# Altium PCB FINAL.PcbDoc
Units mil, origin at the board's own origin, x right, y up, seen from the top; angles counter-clockwise.
Board outline 4000 x 3500 mil, 2 copper layers (Top Layer, Bottom Layer); 13 components, 17 nets, 85 pads, 0 vias.
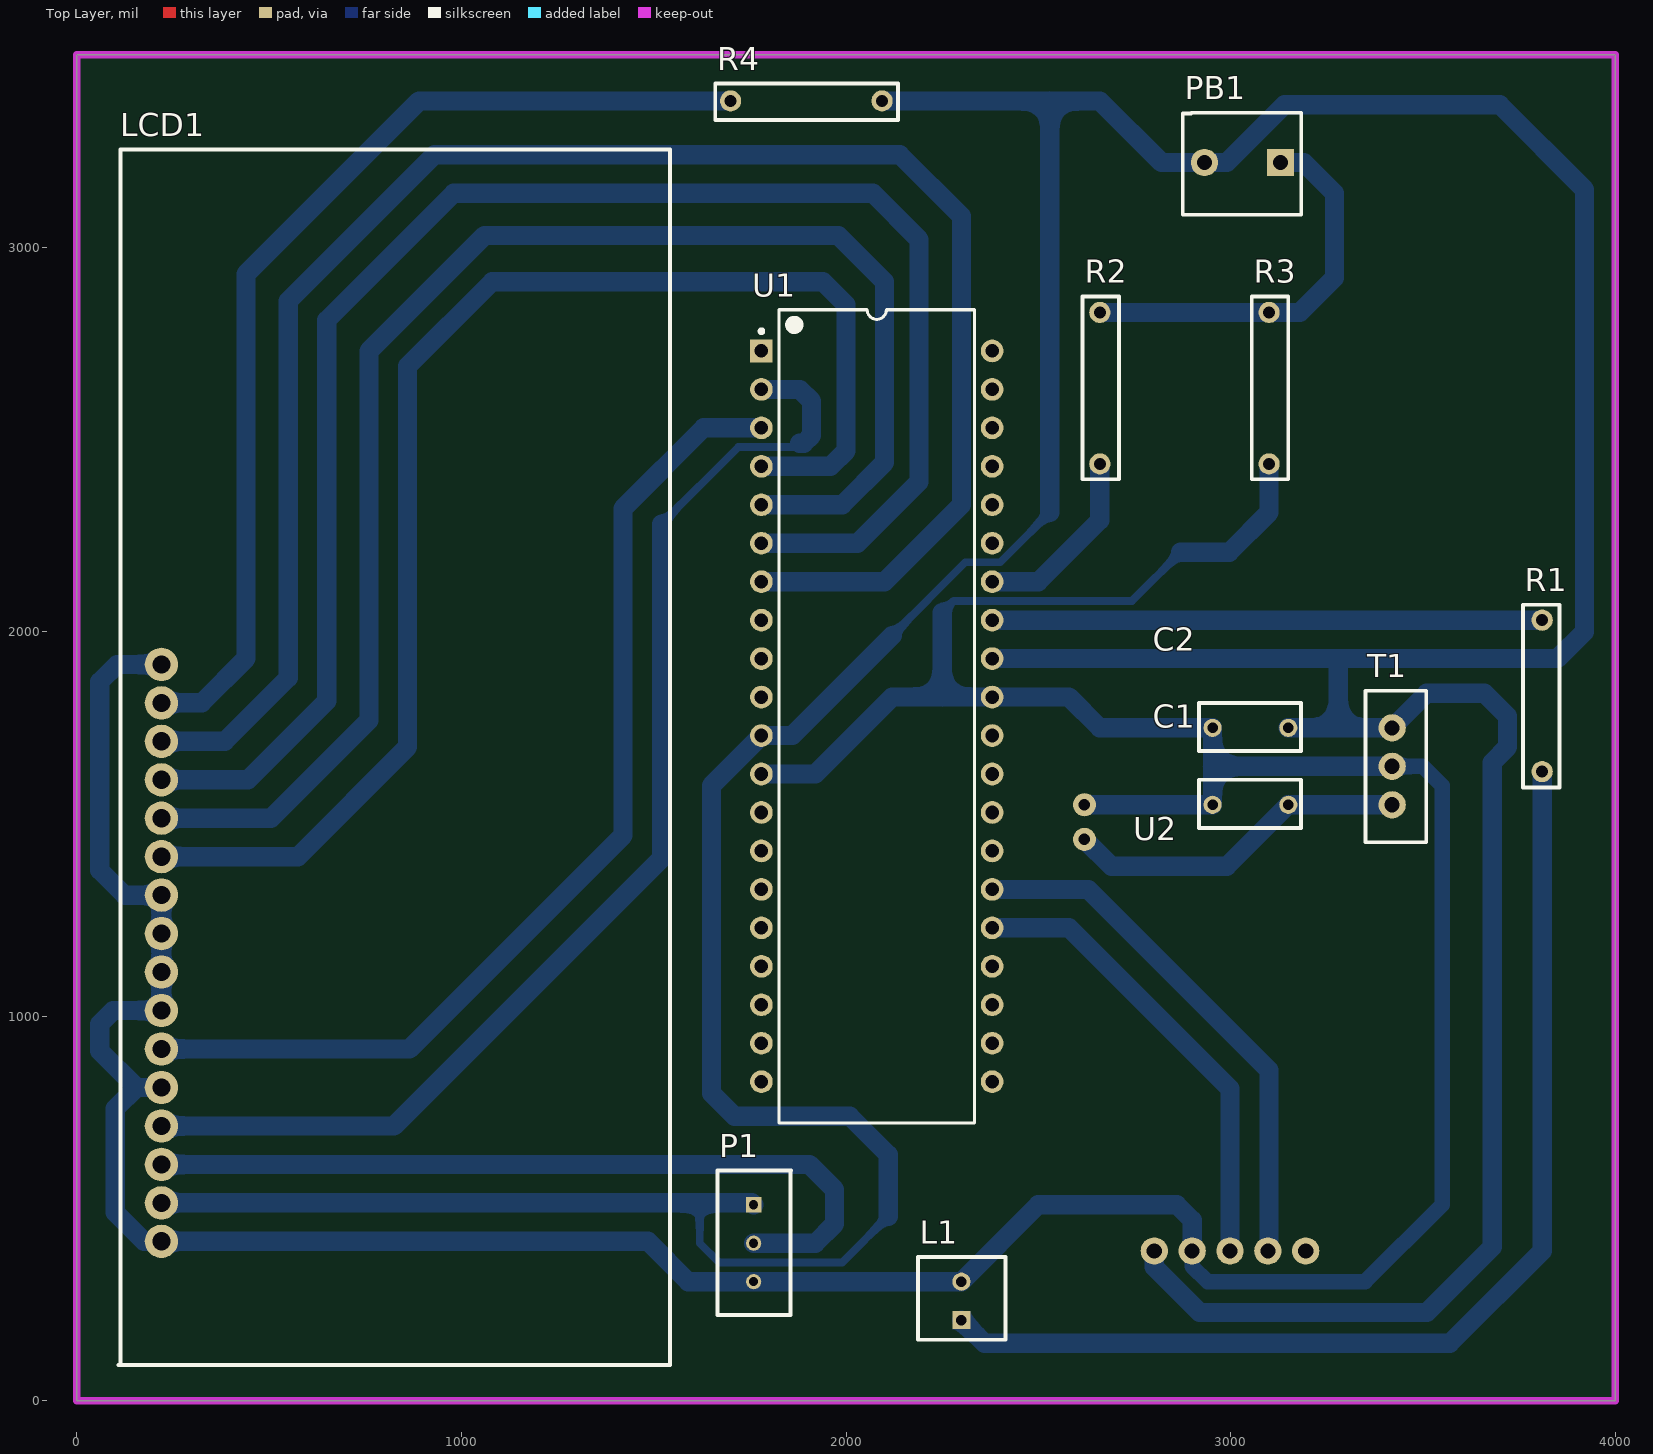
[diagram p0: Top Layer view]
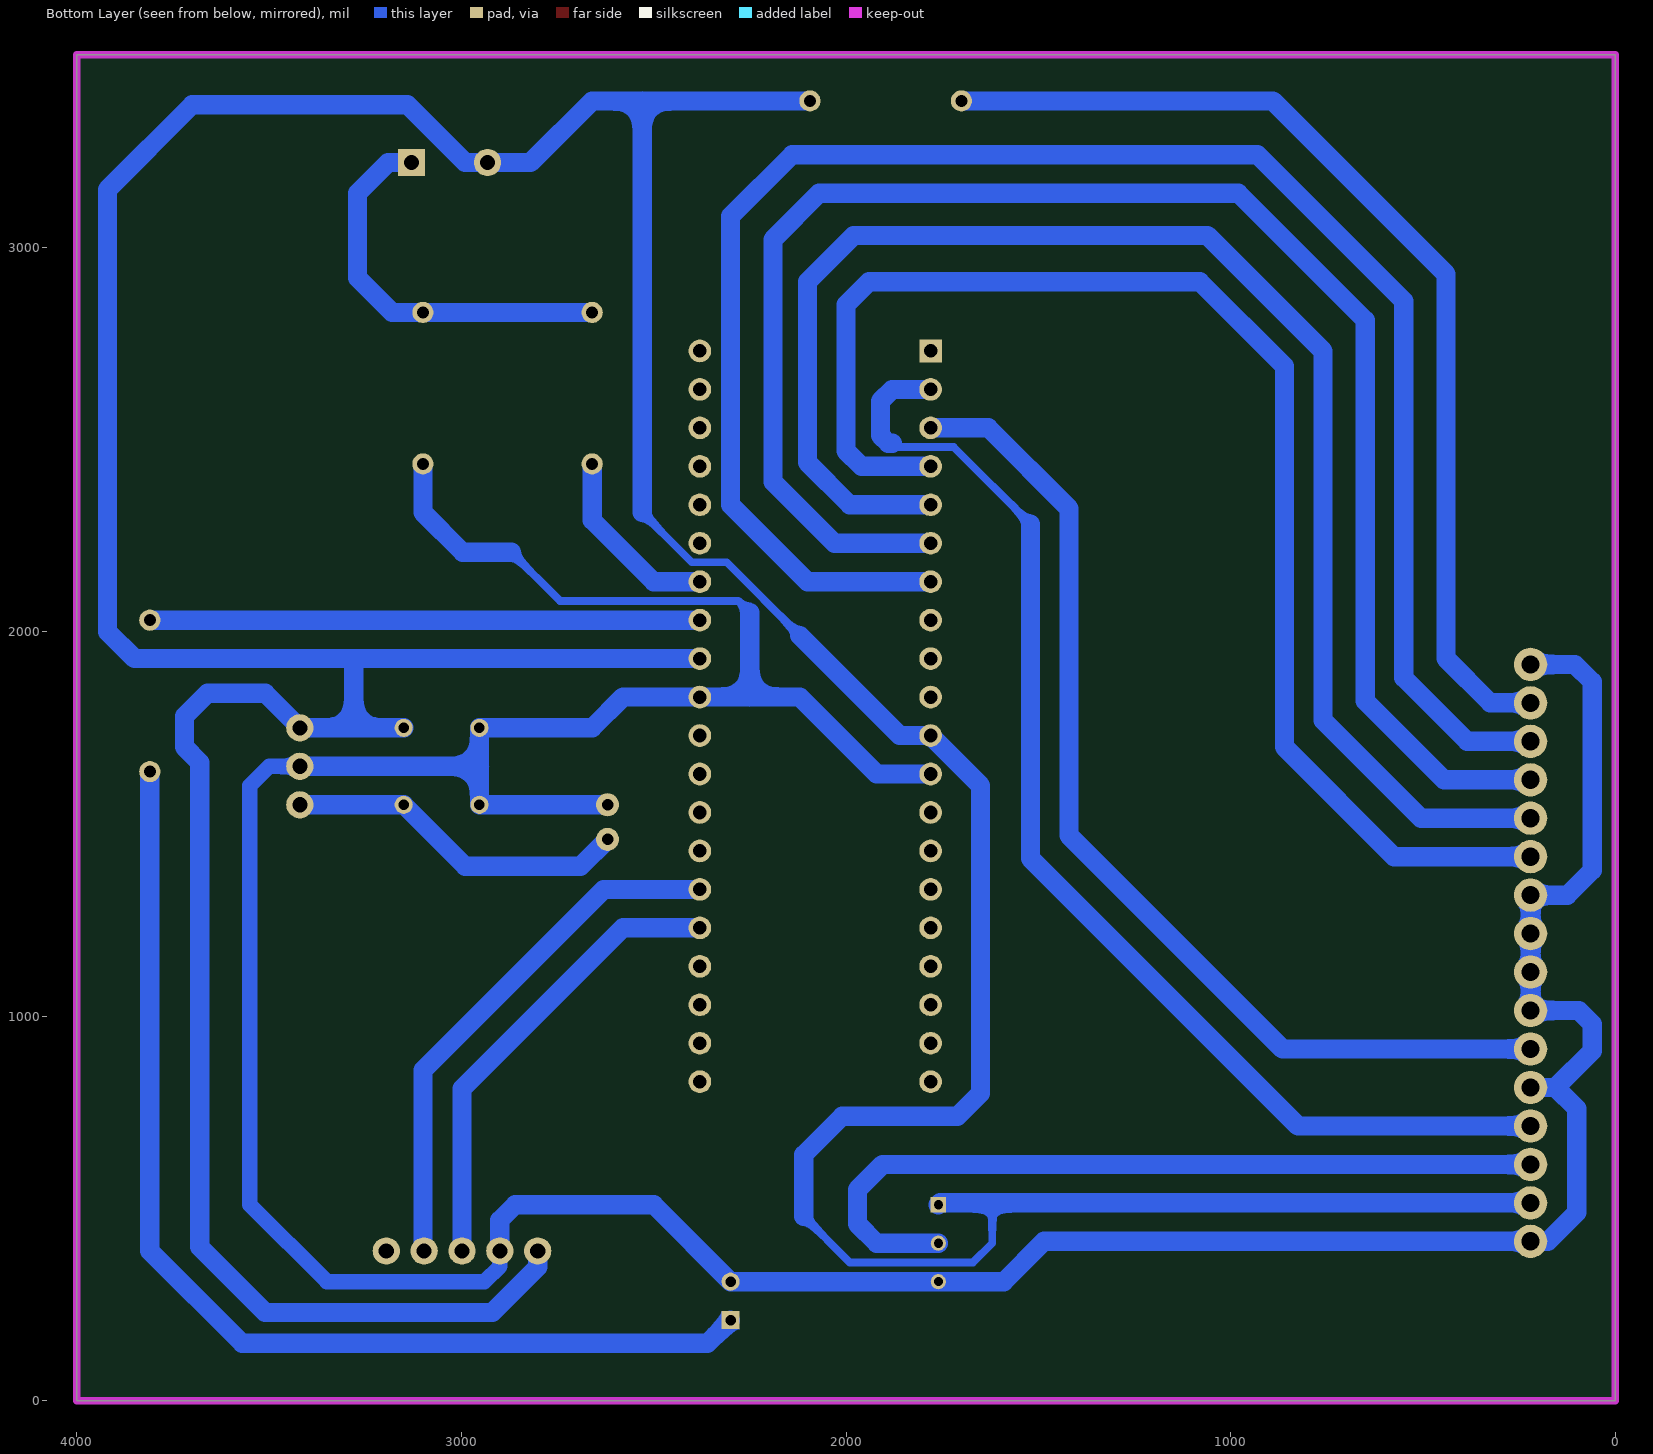
[diagram p1: Bottom Layer view, seen from below]
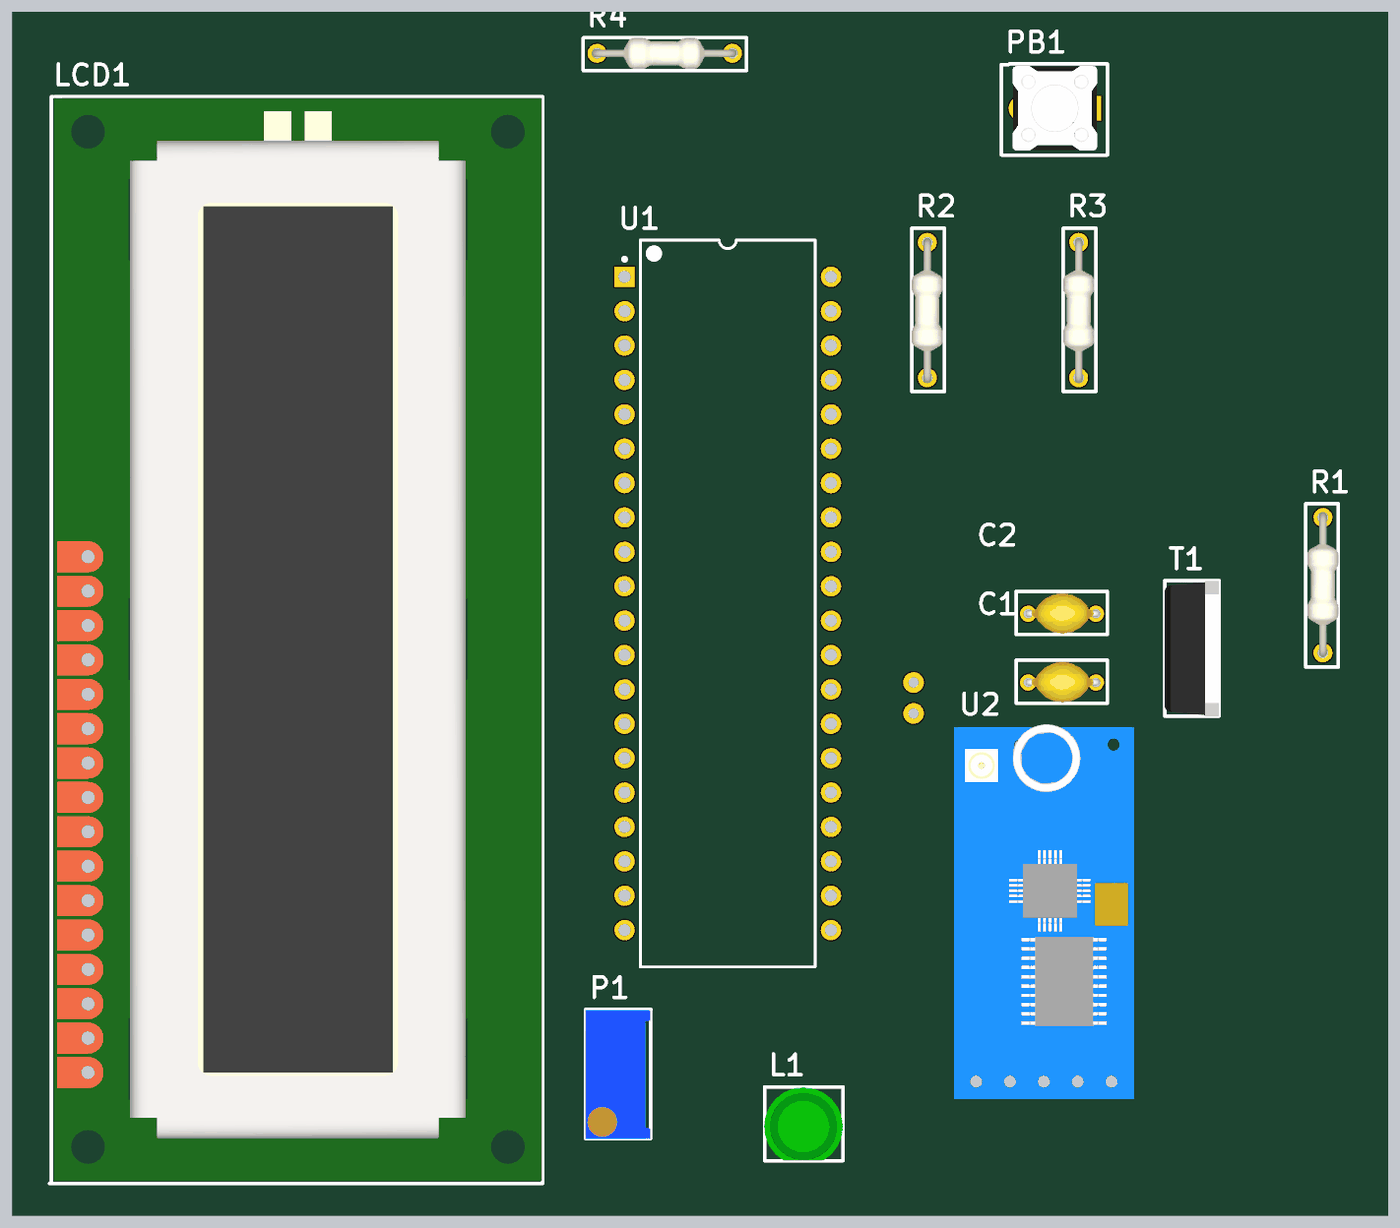
[diagram p2: 3D render of the assembled board from above, using the file's embedded part models]

## Layer stack, top to bottom
Top Solder: solder mask 0.4, Solder Resist, Dk 3.5
Top Layer: signal copper 1.4
Dielectric 1: dielectric 12.6, FR-4, Dk 4.8
Bottom Layer: signal copper 1.4
Bottom Solder: solder mask 0.4, Solder Resist, Dk 3.5

## Board outline
0,0 0,3500 4000,3500 4000,0

## Design rules (kind name [scope] priority, off if disabled: settings)
Clearance [All] p1: gap=10 ignorepadtopadclearanceinfootprint=FALSE
Height [All] p1: minheight=0 maxheight=1500 prefheight=500
PolygonConnect [All] p1: connectstyle=Relief reliefconductorwidth=10 reliefentries=4 polygonreliefangle="90 Angle" airgapwidth=10
RoutingLayers [All] p1: top layer_v5=FALSE bottom layer_v5=TRUE
RoutingVias [All] p1: holewidth=28 width=50 viastyle="Through Hole" minholewidth=28 minwidth=50 maxholewidth=28 maxwidth=50
SolderMaskExpansion [All] p1: expansion=4
Width [All] p1: maxlimit=60 minlimit=20 preferedwidth=55
28 further rules are at their usual default settings.

## Components (designator, comment, footprint, x,y, rotation, side; value= is the part's Value field where it differs from the comment)
C1 "Cap" RAD-0.3 2953.15,1550 r0 top value=100pF
C2 "Cap" RAD-0.3 2953.15,1750 r0 top value=100pF
L1 "LED" LED 2300,210 r180 top
LCD1 "LCD 16*2" LCD 220,415 r90 top
P1 "Potentiometer" Potentiometer 1760,510 r270 top
PB1 "Push Button 2-Pin" "Push Button" 3130,3220 r270 top
R1 "Res1" AXIAL-0.3 3810,2030 r270 top value=1K
R2 "Res1" AXIAL-0.3 2660,2436.3 r90 top value=1K
R3 "Res1" AXIAL-0.3 3100,2436.3 r90 top value=1K
R4 "Res1" AXIAL-0.3 1700,3380 r0 top value=1K
T1 "LM7805" LM7805 3420,1550 r270 top
U1 "PIC16F887-I/P" PDIP600-P40 2080,1780 r0 top
U2 "RF module" HC-12 3195.28,390 r180 top

## Footprints (in the part's own frame and the unit in brackets; to place one, negate y for a bottom-side part, rotate by r counter-clockwise, add the part's x,y. Pads: shape width x height; smd on the part's side, far side on the other; paste and mask are expansions set on the pad)
AXIAL-0.3 [mm] "Axial Device, Thru-Hole; 2 Leads; 0.3 in Pin Spacing"
  round 1.4 hole 0.8: 1(0,0) 2(10,0)
  silkscreen extent -1.02,-1.27 11.05,1.14, body extent -0.4,-1.15 10.31,1.15, height 2.15
HC-12 [mm] "RF module"
  round 1.8 hole 1: 1(0,0) 2(2.5,0) 3(5,0) 4(7.5,0) 5(10,0)
  body extent -1.66,-26.38 11.64,1.32, height 25.91
LCD [mm] "LCD 16x2"
  round 2.2 hole 1.2: A(35.56,0) D0(15.24,0) D1(17.78,0) D2(20.32,0) D3(22.86,0) D4(25.4,0) D5(27.94,0) D6(30.48,0) D7(33.02,0) E(12.7,0) K(38.1,0) RS(7.62,0) RW(10.16,0) V0(5.08,0) VDD(2.54,0) VSS(0,0)
  silkscreen extent -8.17,-33.59 72.1,2.83, body extent -7.98,-33.51 72.02,2.49, height 11.6
LED [mm] "LED"
  rect 1.2x1.2 hole 0.7: 1(0,0)
  round 1.2 hole 0.7: 2(0,-2.54)
  silkscreen extent -2.92,-4.16 2.87,1.29, body extent -2.9,-4.13 2.9,1.27, height 9.2
LM7805 [mm] "Voltage Regulator"
  round 1.8 hole 1: Ground(-2.54,0) Input(0,0) Output(-5.08,0)
  silkscreen extent -7.53,-1.77 2.48,2.25, body extent -7.5,-1.79 2.5,2.22, height 20
PDIP600-P40 [mm] "DIP, 40-Leads, Row Spacing 15.24mm, Pitch 2.54mm, Body 51.8x13.5mm"
  rect 1.5x1.5 hole 0.9: 1(-7.62,24.13)
  round 1.5 hole 0.9: 2(-7.62,21.59) 3(-7.62,19.05) 4(-7.62,16.51) 5(-7.62,13.97) 6(-7.62,11.43) 7(-7.62,8.89) 8(-7.62,6.35) 9(-7.62,3.81) 10(-7.62,1.27) 11(-7.62,-1.27) 12(-7.62,-3.81) 13(-7.62,-6.35) 14(-7.62,-8.89) 15(-7.62,-11.43) 16(-7.62,-13.97) 17(-7.62,-16.51) 18(-7.62,-19.05) 19(-7.62,-21.59) 20(-7.62,-24.13) 21(7.62,-24.13) 22(7.62,-21.59) 23(7.62,-19.05) 24(7.62,-16.51) 25(7.62,-13.97) 26(7.62,-11.43) 27(7.62,-8.89) 28(7.62,-6.35) 29(7.62,-3.81) 30(7.62,-1.27) 31(7.62,1.27) 32(7.62,3.81) 33(7.62,6.35) 34(7.62,8.89) 35(7.62,11.43) 36(7.62,13.97) 37(7.62,16.51) 38(7.62,19.05) 39(7.62,21.59) 40(7.62,24.13)
  silkscreen extent -7.74,-26.85 6.45,26.85, body extent -7.3,-26.85 7.3,26.85, height 6.35
Potentiometer [mm] "10k Ohm"
  rect 1x1 hole 0.6: 1(0,0)
  round 1 hole 0.6: 2(2.54,0) 3(5.08,0)
  silkscreen extent -2.26,-2.38 7.27,2.47, body extent -2.21,-2.4 7.32,2.43, height 11.55
"Push Button" [mm] "Push button 2 PIN"
  rect 1.8x1.8 hole 1: 1(0,0)
  round 1.8 hole 1: 2(0,-5.03)
  silkscreen extent -3.28,-6.46 3.45,1.36, body extent -3.11,-5.64 3.11,0.6, height 5
RAD-0.3 [mm] "Radial Cap, Thru-Hole; 2 Leads; 0.3 in Pin Spacing"
  round 1.2 hole 0.7: 1(0,0) 2(5,0)
  silkscreen extent -0.89,-1.52 5.84,1.65, body extent -0.18,-1.48 5.26,1.52, height 4.47

## Part data
C1 C2: "Capacitor Ceramico", Capacitance=100nF, Case/Package=0402, Case Code (Metric)=1005, Dielectric=X5R, Dielectric Material=Ceramic, Manufacturer=KEMET, Manufacturer Part Number=C0402C104K8PACTU, Max Operating Temperature=85°C, Min Operating Temperature=-55°C, Package Quantity=1, Supplier Part Number 1=C0402C104K8PAC7867, Tolerance=10%, Voltage=10V, Case Code (Imperial)=0402, Contact Plating=Matte,Tin, Depth=0.5mm, Dissipation Factor=5%, Height=0.5mm, LatestRevisionDate=17-Jul-2002, LatestRevisionNote="Re-released for DXP Platform.", Lead Free="Lead Free", Lead Pitch=0.3mm, Length=1mm, Mount="PCB,Surface Mount", Number of Pins=2, PackageDescription="Radial Cap, Thru-Hole; 2 Leads; 0.3 in Pin Spacing", PackageReference=RAD-0.3, Packaging="Tape and Reel", Published=8-Jun-2000, Publisher="Altium Limited", Radiation Hardening=No, REACH SVHC="No SVHC", Stock 1=0, Supplier 1=Arrow, Termination=SMD/SMT, Thickness=0.022inch, Voltage Rating=10V, Voltage Rating (DC)=10V, Width=0.02inch
L1: Case/Package=0603, Case Code (Metric)=1608, Colour=Green, Current=1A, Forward Current=30mA, Forward Voltage=2.1V, Lens Colour=Clear,Colorless, Manufacturer="Vishay Lite-On", Manufacturer Part Number=LTST-C190GKT, Max Operating Temperature=85°C, Min Operating Temperature=-55°C, Package Quantity=1, Power Dissipation=100mW, Reverse Voltage=5V, Supplier Part Number 1=859-LTST-C190GKT, Test Current=10mA, Voltage=2V, Case Code (Imperial)=0603, Depth=0.8mm, Dominant Wavelength=569nm, Height=0.8mm, Illumination Colour=Green, Lead Free="Lead Free", Length=1.6mm, Lens Style=Clear,Colorless,Diffused,Rectangular, Lens Transparency=Clear, Luminous Intensity=6mcd, Mount="Surface Mount", Number of Elements=1, Number of LEDs=1, Number of Pins=2, Packaging="Tape and Reel", Power Rating=100mW, Pricing 1="1=0.25, 10=0.13, 50=0.13, 100=0.061, 1000=0.045, 10000=0.034 (USD)", Radiation Hardening=No, Stock 1=402291, Supplier 1=Mouser, Viewing Angle=130°, Wavelength=565nm, Width=0.8mm
LCD1: library part LCD, Background Colour=Green, Manufacturer="Newhaven Display", Manufacturer Part Number=NHD-0216K3Z-FL-GBW-V3, Max Operating Temperature=70°C, Min Operating Temperature=-20°C, Operating Supply Voltage=5V, Package Quantity=100, Supplier Part Number 1=70518162, Backlight Type=LED, Interface=I2C,RS-232,SPI, Number of Characters=32, Stock 1=0, Supplier 1="Allied Electronics"
P1: Case/Package=Metal, Manufacturer=Bourns, Manufacturer Part Number=91A1A-G28-B15L, Max Operating Temperature=125°C, Max Power Dissipation=1W, Min Operating Temperature=-40°C, Package Quantity=5, Power Rating=500mW, Resistance=10kR, Supplier Part Number 1=652-91A1A-G28-B15L, Temperature Coefficient=1000ppm/°C, Tolerance=20%, Voltage Rating=1.5kV, Actuator Diameter=0.25inch, Actuator Length=0.875inch, Composition="Conductive Plastic", Depth=22.86mm, Hole Diameter=9.525mm, Length=15.88mm, Mount="Panel,Through Hole", Number of Gangs=1, Number of Turns=1, Packaging=Bulk, Pricing 1="1=7.31, 10=7.05, 50=5.75, 100=5.22, 1000=3.53, 10000=3.53 (USD)", REACH SVHC="No SVHC", Stock 1=86, Supplier 1=Mouser, Taper=Linear, Termination=Pin, Voltage Rating (DC)=1.5kV, Weight=0.447979oz, Width=15.88mm
PB1: library part "Push button", Colour=Black, Manufacturer="ITT C&K", Manufacturer Part Number=G003A, Package Quantity=500, Supplier Part Number 1=611-G003A, Diameter=6.2mm, Height=9.04mm, Illumination Colour=Black, Illumination Type=Non-Illuminated, Lead Free="Lead Free", Packaging=Bulk, Pricing 1="1=0.44, 10=0.44, 50=0.425, 100=0.416, 1000=0.296, 10000=0.28 (USD)", Radiation Hardening=No, Shape=Round, Stock 1=2542, Supplier 1=Mouser
R1 R2 R3 R4: "Resistor", LatestRevisionDate=17-Jul-2002, LatestRevisionNote="Re-released for DXP Platform.", PackageDescription="Axial Device, Thru-Hole; 2 Leads; 0.3 in Pin Spacing", PackageReference=AXIAL-0.3, Published=8-Jun-2000, Publisher="Altium Limited"
T1: "Voltage Regulator", Case/Package=TO-220-3, Current Rating=1A, Dropout Voltage=2V, Manufacturer="ON Semiconductor / Fairchild", Manufacturer Part Number=LM7805CT, Max Input Voltage=35V, Max Operating Temperature=125°C, Max Output Voltage=5.2V, Min Input Voltage=7V, Min Operating Temperature=-40°C, Min Output Voltage=5V, Output Voltage Accuracy=4%, Package Quantity=50, Power Supply Rejection Ratio (PSRR)=73dB, Quiescent Current=8mA, Supplier Part Number 1=34C1092, Accuracy=4%, Height=16.3mm, Lead Free="Lead Free", Length=10.67mm, Max Output Current=1A, Mount="Through Hole", Nominal Output Voltage=5V, Number of Outputs=1, Number of Pins=3, Number of Regulators=1, Output Current=1A, Output Type=Fixed, Output Voltage=5V, Packaging=Rail/Tube, Polarity=Positive, Radiation Hardening=No, REACH SVHC="No SVHC", Stock 1=0, Supplier 1=Newark, Weight=1.214g, Width=4.7mm
U1: "Flash-Based, 8-Bit CMOS Microcontroller with nanoWatt Technology, 8K (x14-Bit words) Program Memory, 624 Bytes Data Memory, 35 I/O pins, 40-Pin PDIP, Standard VDD Range, Industrial Temperature", Supplier Part Number 1=PIC16F887-I/P-ND, ComponentLink1Description=Datasheet, ComponentLink1URL=http://ww1.microchip.com/downloads/en/DeviceDoc/41291F.pdf, ComponentLink2Description="Packaging Specification", ComponentLink2URL=http://www.microchip.com/stellent/groups/techpub_sg/documents/packagingspec/en012702.pdf, ComponentLink3Description="Microchip.com Home", ComponentLink3URL=http://www.microchip.com/, DatasheetVersion="revF, Apr-2009", LatestRevisionDate=02-Dec-2009, LatestRevisionNote="Updated datasheet to version revF, Apr-2009.", PackageDescription="40-Lead Plastic Dual In-Line (P) - 600 mil Body [PDIP]", PackageReference=PDIP600-P40, PackageVersion="revBB, Aug-2009", Published=29-Jan-2009, Publisher="Altium Limited", Supplier 1=Digi-Key, Supplier 2=Farnell, Supplier Part Number 2=1439541
U2: library part HC-12, "HC-11 1000m", Case/Package=Module, Current - Receiving=3mA, Current - Transmitting=25mA, Frequency=870MHz, Manufacturer=Microchip, Manufacturer Part Number=MRF89XAM8A-I/RM, Max Operating Temperature=85°C, Max Supply Voltage=3.6V, Min Operating Temperature=-40°C, Min Supply Voltage=2.1V, Operating Supply Current=18mA, Operating Supply Voltage=3.3V, Package Quantity=54, Supplier Part Number 1=2496484, Contact Plating=Matte,Tin, Data Rate=40Kbps, Depth=17.78mm, Height=0.075inch, Interface=SPI, Lead Free="Lead Free", Length=27.94mm, Logic Function=Transceiver, Max Frequency=870MHz, Mount="Surface Mount", Nominal Supply Current=25mA, Number of Channels=59, Number of Drivers=1, Number of Pins=12, Number of Receivers=1, Number of Transceivers=1, Number of Transmitters=1, Packaging=Tray, Pricing 1="1=49.59, 5=48.04, 10=47.12, 25=40.3 (GBP)", Propagation Delay=25ns, Radiation Hardening=No, REACH SVHC="No SVHC", Sensitivity=-113dBm, Simplex/Duplex="Half Duplex", Stock 1=13, Supplier 1=Farnell, Weight=0.004706oz, Width=0.7inch

## Free pads (board coordinates)
  round 60 hole 30: 2(2620,1460) 3(2620,1550)

## Nets (pads, with @x,y where several pads share a name; then routed paths per layer and width w, separated by ;. In a path a pad name is that pad's centre, name@x,y a point inside that pad or via, vN(x,y) a via of type N, cw(c..) or ccw(c..) an arc to the next point about the centre after c; other vN are vias at no path point)
GND: C1.1 C2.1 L1.2 LCD1.D0 LCD1.D1 LCD1.D2 LCD1.D3 LCD1.K LCD1.RW LCD1.VSS P1.3 pad.3 R3.1 T1.Ground U1.12 U1.31 U2.4 | length 10624.4
  Bottom Layer w20: 2250,2050 2280,2080 2743.7,2080 2870,2206.3
  Bottom Layer w40: U2.4 2900,350 2940,310 3350,310 3550,510 3550,1600 3500,1650 T1.Ground
  Bottom Layer w50: LCD1.RW 155,815 ; LCD1.K 105,1915 60,1870 60,1380 125,1315 LCD1.D3 LCD1.D2 LCD1.D1 LCD1.D0 95,1015 60,980 60,910 155,815 ; U1.12 1920,1630 2120,1830 2250,1830 ; 2250,2050 2250,1830 ; pad.3 C1.1 2953.15,1650 ; 2870,2206.3 2996.3,2206.3 3100,2310 R3.1 ; U2.4 2900,470 2860,510 2500,510 L1.2 P1.3 1590,310 1485,415 LCD1.VSS 175,415 100,490 100,760 155,815 ; T1.Ground 2953.15,1650 ; 2250,1830 U1.31 2580,1830 2660,1750 C2.1 2953.15,1650
NetC1_2: C1.2 pad.2 T1.Input | length 895.3
  Bottom Layer w50: pad.2 2690,1390 2990,1390 C1.2 T1.Input
NetC2_2: C2.2 LCD1.VDD P1.1 PB1.2 R4.2 T1.Output U1.11 U1.32 U2.5 | length 13955
  Bottom Layer w20: 1620,515 1620,410 1670,360 1990,360 2110,480 ; 2120,1990 2310.47,2180.47 2400.52,2180.47 2429.53,2209.49 ; 2429.53,2209.53 2530,2310
  Bottom Layer w50: LCD1.VDD 1620,515 1755,515 P1.1 ; R4.2 2530,3380 ; 2110,480 2110,640 2010,740 1710,740 1650,800 1650,1600 U1.11 1860,1730 2120,1990 ; U1.32 3270,1930 ; 2530,2310 2530,3380 ; U2.5 2801.58,348.42 2920,230 3510,230 3680,400 3680,1660 3720,1700 3720,1780 3660,1840 3510,1840 T1.Output 3280,1750 ; C2.2 3280,1750 ; 2530,3380 2660,3380 2820,3220 PB1.2 2990,3220 3140,3370 3700,3370 3920,3150 3920,2000 3850,1930 3270,1930 ; 3270,1930 3280,1920 3280,1750
NetL1_1: L1.1 R1.2 | length 2880.6
  Bottom Layer w50: L1.1 2360,150 3570,150 3810,390 R1.2
NetLCD1_A: LCD1.A R4.1 | length 2714
  Bottom Layer w50: LCD1.A 325,1815 440,1930 440,2930 890,3380 R4.1
NetLCD1_D4: LCD1.D4 U1.4 | length 3620.6
  Bottom Layer w50: LCD1.D4 575,1415 860,1700 860,2690 1080,2910 1940,2910 2000,2850 2000,2470 1960,2430 U1.4
NetLCD1_D5: LCD1.D5 U1.5 | length 3955.2
  Bottom Layer w50: LCD1.D5 505,1515 760,1770 760,2730 1060,3030 1980,3030 2100,2910 2100,2440 1990,2330 U1.5
NetLCD1_D6: LCD1.D6 U1.6 | length 4337.6
  Bottom Layer w50: LCD1.D6 445,1615 650,1820 650,2810 980,3140 2070,3140 2190,3020 2190,2390 2030,2230 U1.6
NetLCD1_D7: LCD1.D7 U1.7 | length 4704.9
  Bottom Layer w50: LCD1.D7 385,1715 550,1880 550,2860 930,3240 2140,3240 2300,3080 2300,2330 2100,2130 U1.7
NetLCD1_E: LCD1.E U1.3 | length 2726.9
  Bottom Layer w50: LCD1.E 865,915 1420,1470 1420,2320 1630,2530 U1.3
NetLCD1_RS: LCD1.RS U1.2 | length 3171.4
  Bottom Layer w20: 1520,2280 1720,2480 1880,2480
  Bottom Layer w50: LCD1.RS 825,715 1520,1410 1520,2280 ; U1.2 1880,2630 1910,2600 1910,2510 1890,2490 1880,2490
NetLCD1_V0: LCD1.V0 P1.2 | length 2097.6
  Bottom Layer w50: LCD1.V0 1905,615 1970,550 1970,460 1920,410 P1.2
NetPB1_1: PB1.1 R2.2 R3.2 | length 1040.4
  Bottom Layer w50: R2.2 R3.2 3180,2830 3270,2920 3270,3140 3190,3220 PB1.1
NetR1_1: R1.1 U1.33 | length 1430
  Bottom Layer w50: U1.33 R1.1
NetR2_1: R2.1 U1.34 | length 492.6
  Bottom Layer w50: U1.34 2500,2130 2660,2290 R2.1
NetU1_25: U1.25 U2.3 | length 1213.3
  Bottom Layer w50: U1.25 2580,1230 2998.43,811.57 U2.3
NetU1_26: U1.26 U2.2 | length 1386
  Bottom Layer w50: U1.26 2630,1330 3100,860 3100,393.15 U2.2
pads on no net: U1.1 U1.8 U1.9 U1.10 U1.13 U1.14 U1.15 U1.16 U1.17 U1.18 U1.19 U1.20 U1.21 U1.22 U1.23 U1.24 U1.27 U1.28 U1.29 U1.30 U1.35 U1.36 U1.37 U1.38 U1.39 U1.40 U2.1

## Keep-outs
Keep-Out Layer:
  the board outline again, w19.68